# Altium PCB 64 Channel Stim (Inverted Microscope).PcbDoc
Units mm, origin at the board's own origin, x right, y up, seen from the top; angles counter-clockwise.
Board outline 85.5 x 85.5 mm, 2 copper layers (Top Layer, Bottom Layer); 21 components, 77 nets, 222 pads, 115 vias.
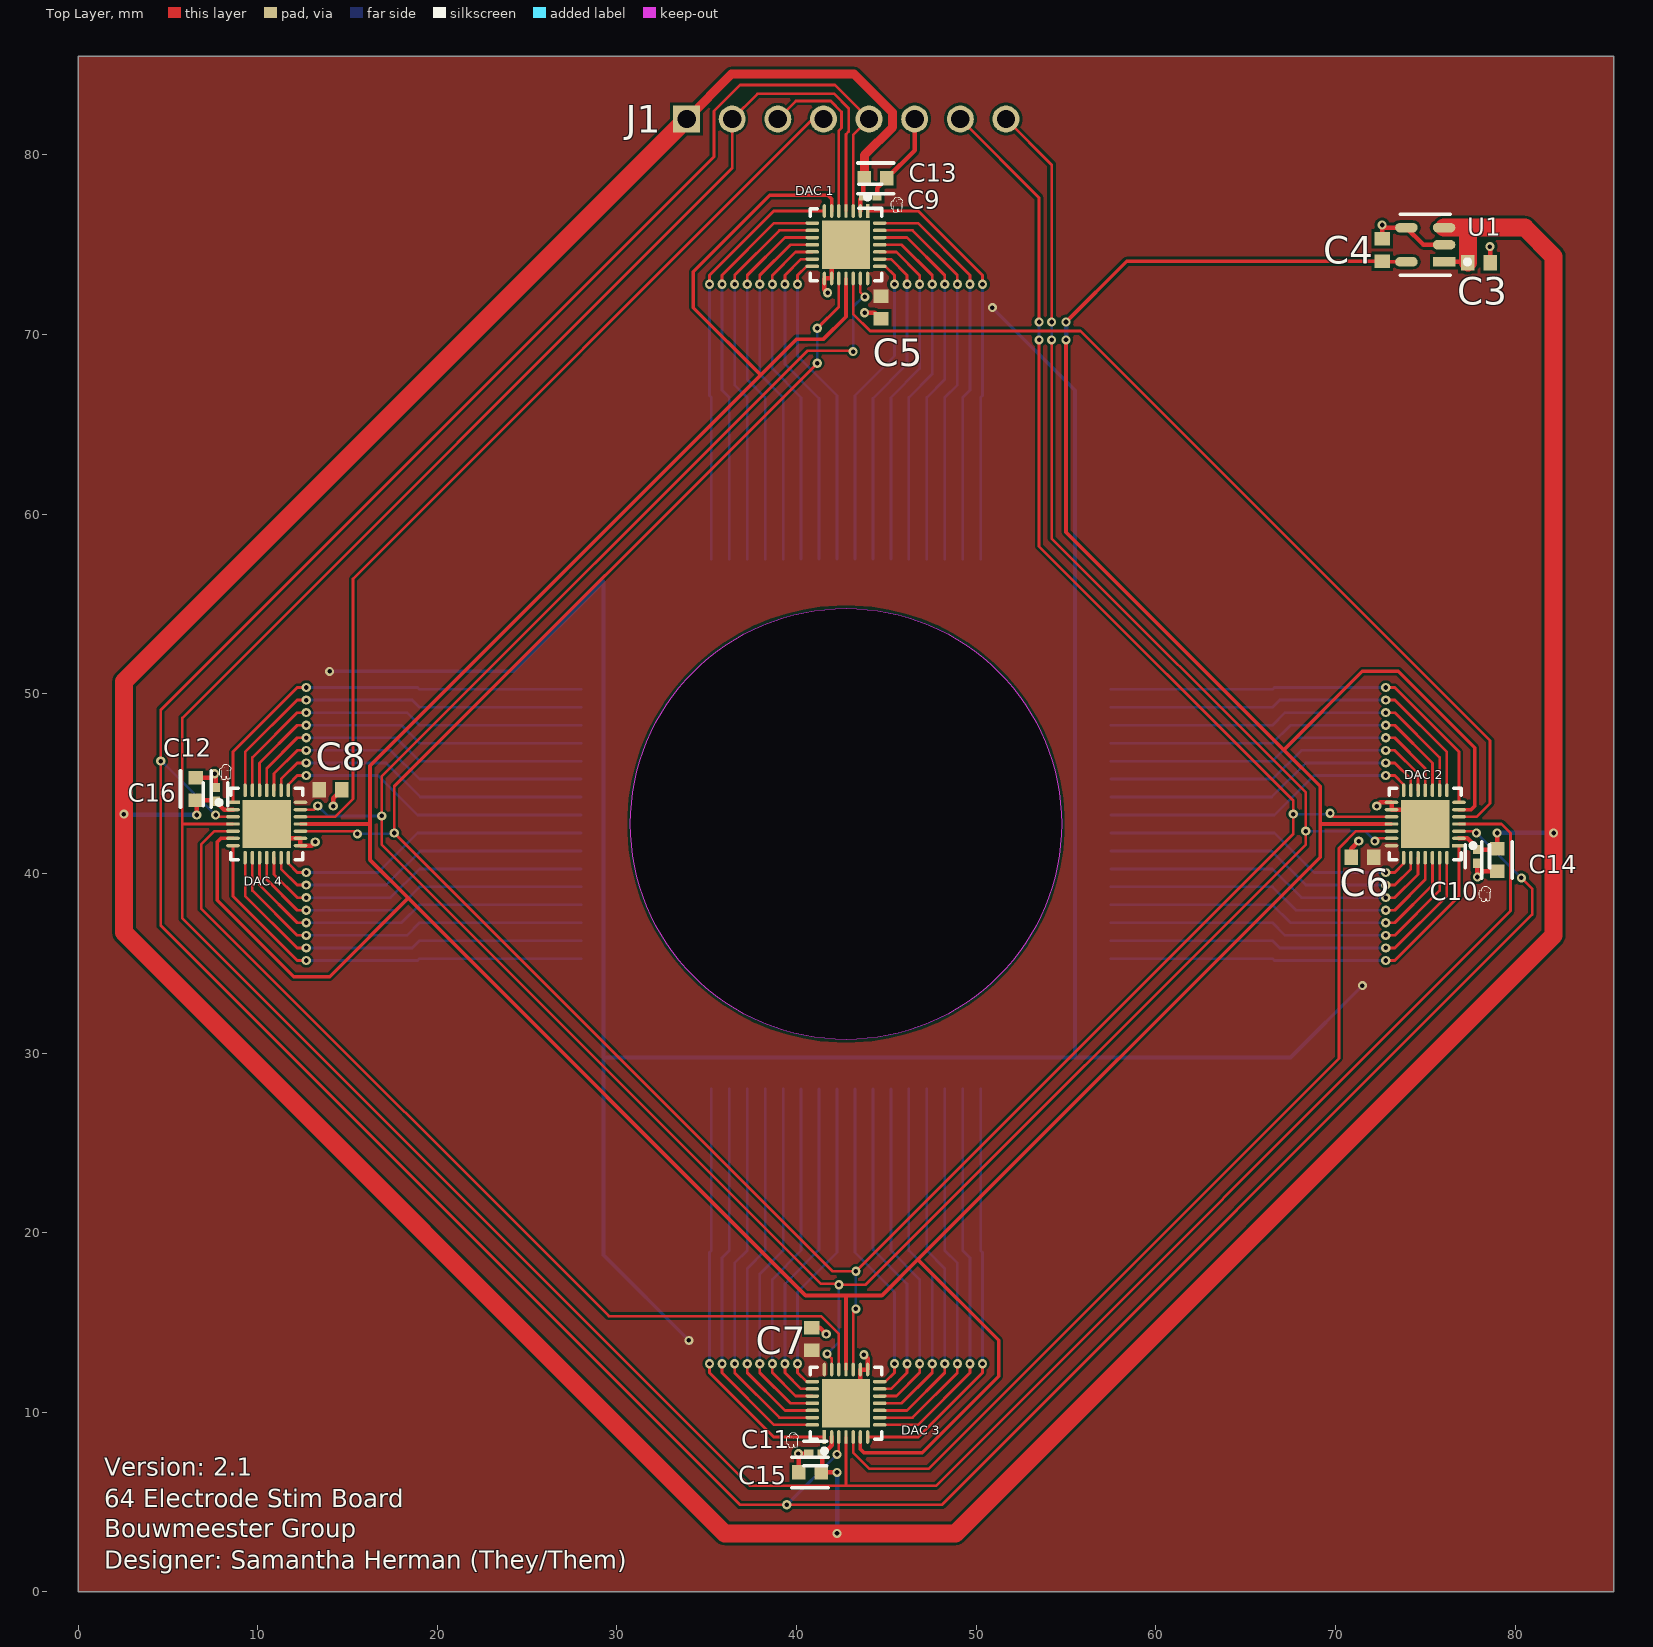
[diagram p0: Top Layer view]
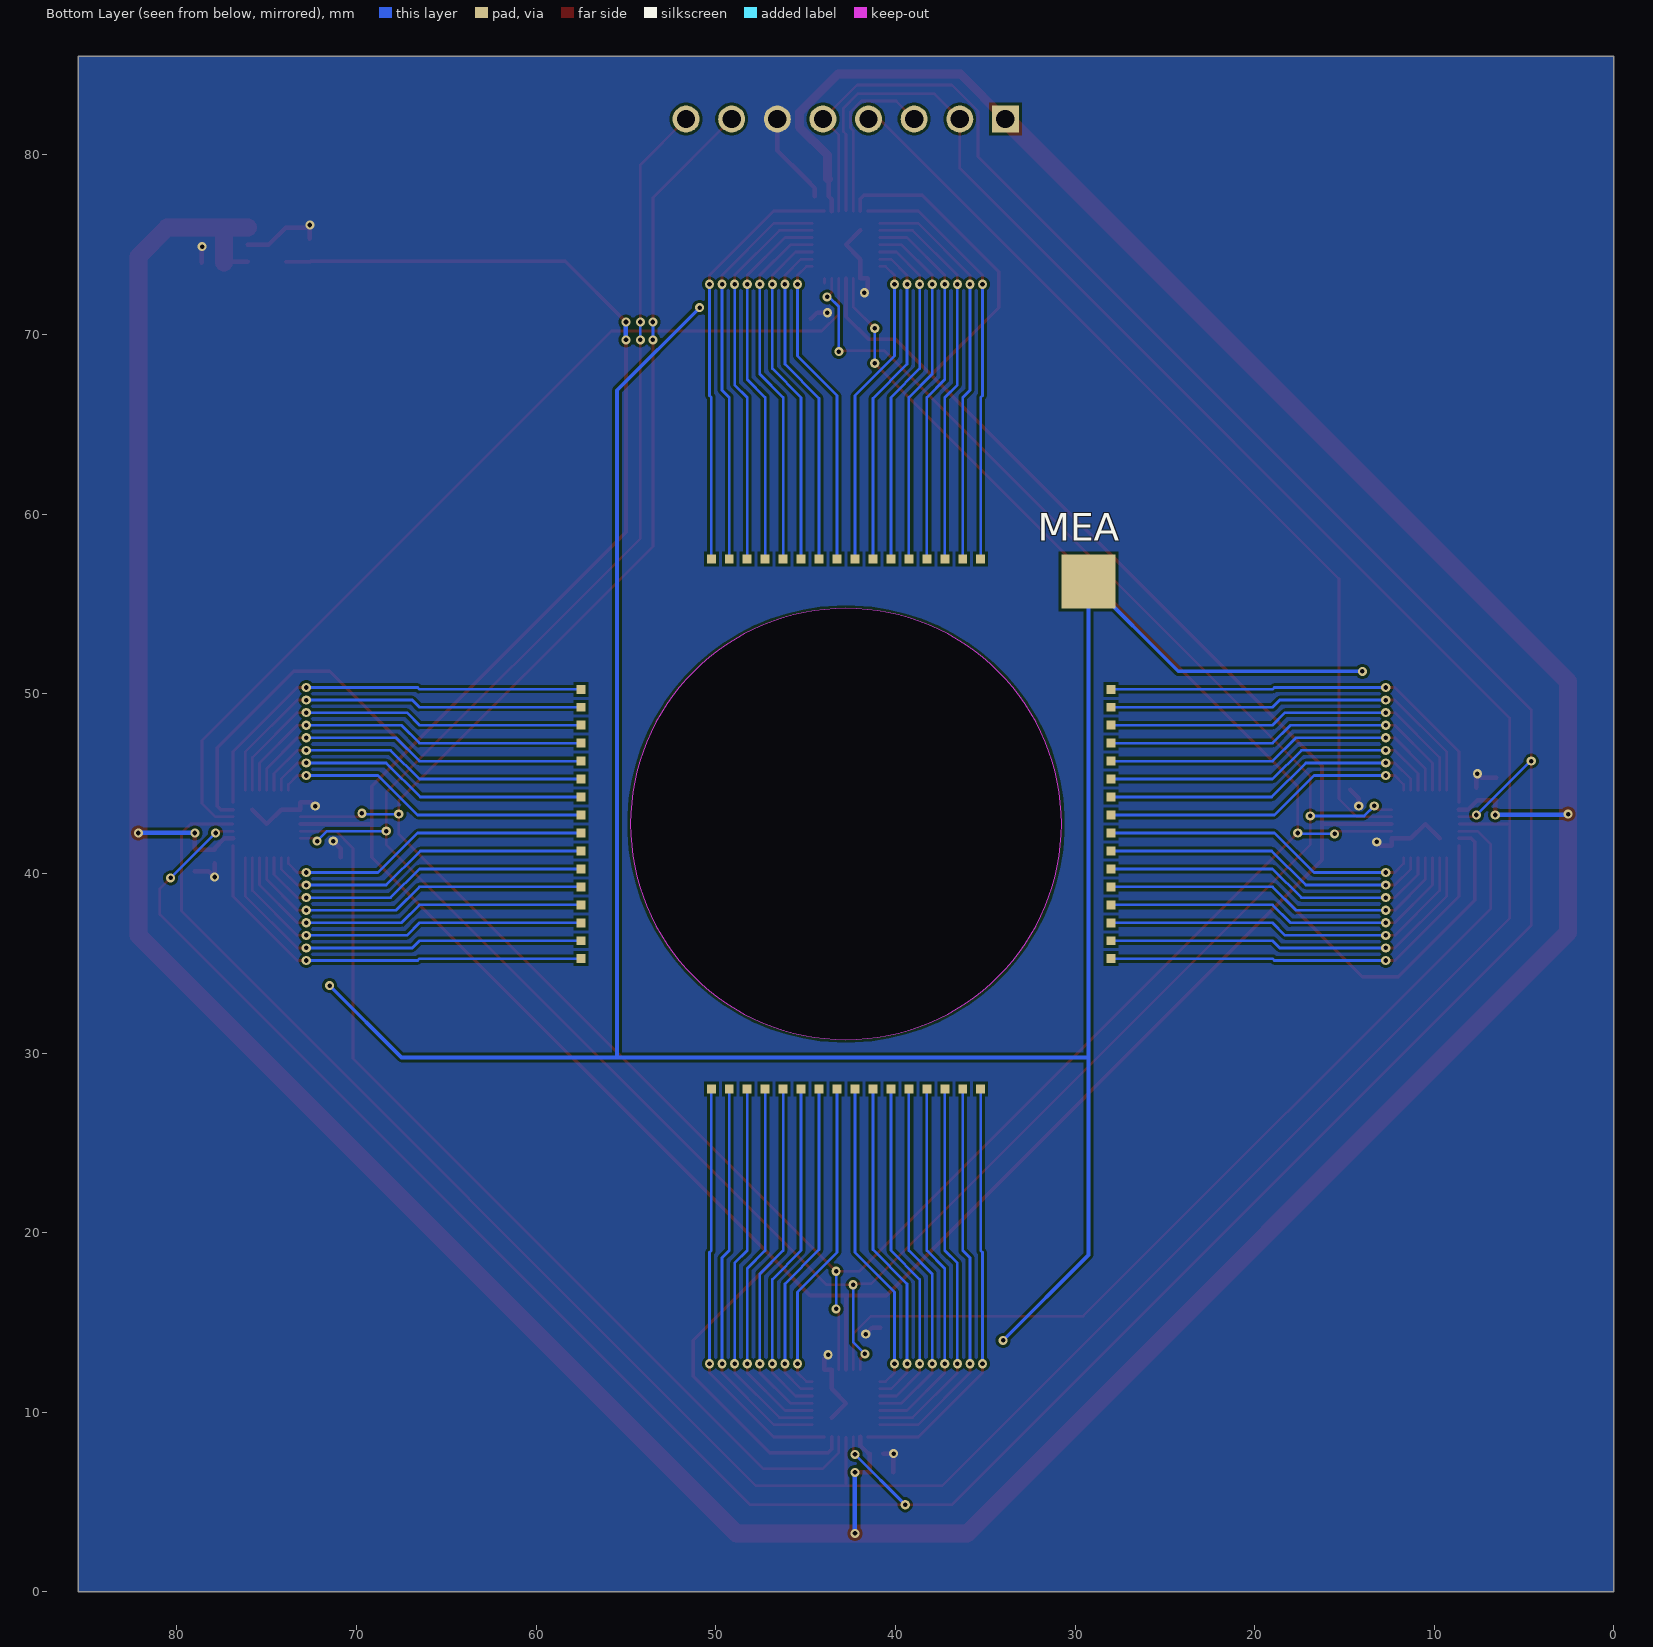
[diagram p1: Bottom Layer view, seen from below]
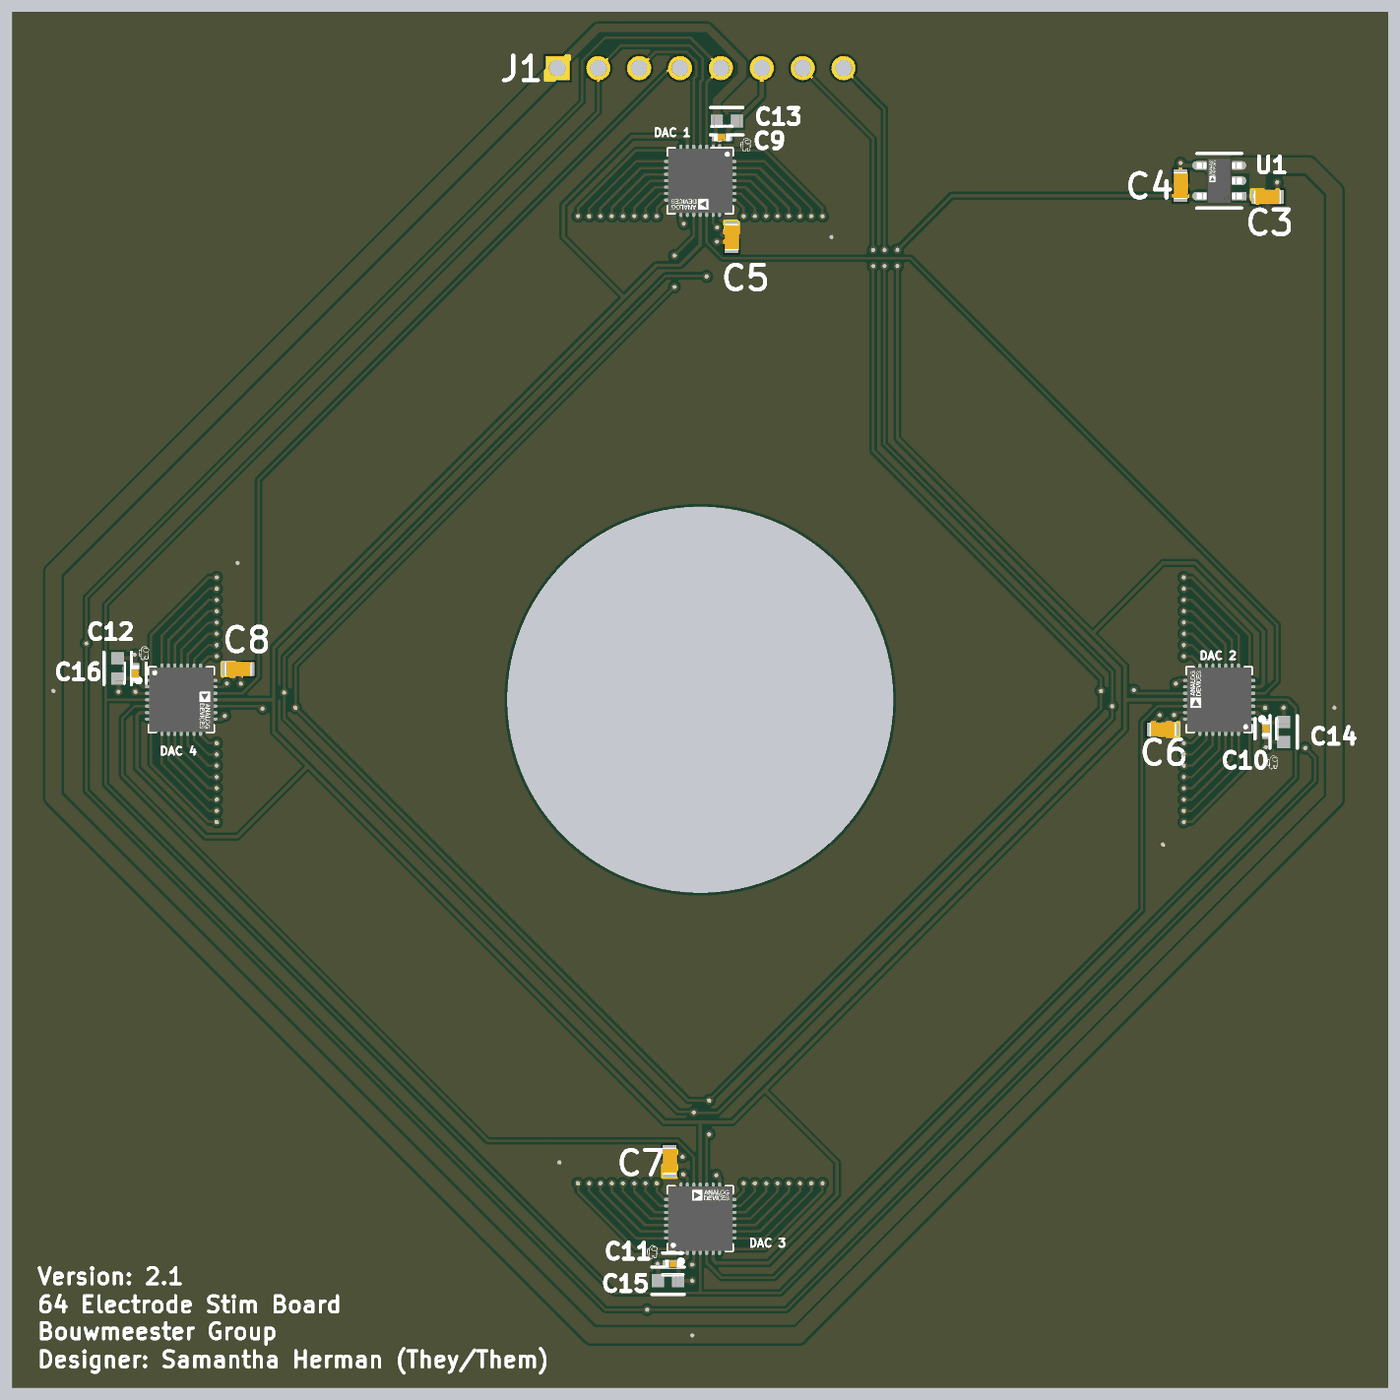
[diagram p2: 3D render of the assembled board from above, using the file's embedded part models]

## Layer stack, top to bottom
Top Solder: solder mask 0.0102, Solder Resist, Dk 3.5
Top Layer: signal copper 0.0356
Dielectric 1: dielectric 0.32, FR-4, Dk 4.8
Bottom Layer: signal copper 0.0356
Bottom Solder: solder mask 0.0102, Solder Resist, Dk 3.5

## Board outline
0,0 0,85.5 85.5,85.5 85.5,0
cut-out: 42.75,30.75 cw(c42.75,42.75) 30.75,42.75 cw(c42.75,42.75) 42.75,54.75 cw(c42.75,42.75) 54.75,42.75 cw(c42.75,42.75)

## Design rules (kind name [scope] priority, off if disabled: settings)
Clearance [All] p1: gap=0.152 ignorepadtopadclearanceinfootprint=TRUE except(0: Arc-Hole Track-Hole SMDPad-Hole THPad-Hole Via-Hole Fill-Hole Poly-Hole Region-Hole Text-Hole)
PlaneConnect [All] p1: planeconnectstyle=Direct reliefexpansion=0.508 reliefentries=4 reliefconductorwidth=0.254 reliefairgap=0.254
PolygonConnect [All] p1: connectstyle=Direct reliefconductorwidth=0.254 reliefentries=4 polygonreliefangle="90 Angle" airgapwidth=0.254
RoutingVias [All] p1: holewidth=0.254 width=0.508 viastyle="Through Hole" minholewidth=0.254 minwidth=0.508 maxholewidth=0.254 maxwidth=0.508
SolderMaskExpansion [All] p1: expansion=0.102 istentingtop=FALSE
Width [All] p1: maxlimit=1 minlimit=0.152 preferedwidth=0.2 minimp=50.000000 maximp=50.000000 favimp=50.000000
29 further rules are at their usual default settings.

## Components (designator, comment, footprint, x,y, rotation, side; value= is the part's Value field where it differs from the comment)
C3 "2.2 µF" CAPC1608X90X30LL10T20 78,74 r180 top
C4 "2.2 µF" CAPC1608X90X30LL10T20 72.6,74.7 r270 top
C5 "2.2 µF" CAPC1608X90X30LL10T20 44.7,71.5 r270 top
C6 "2.2 µF" CAPC1608X90X30LL10T20 71.5,40.9 r0 top
C7 "2.2 µF" CAPC1608X90X30LL10T20 40.85,14.075 r270 top
C8 "2.2 µF" CAPC1608X90X30LL10T20 14.05,44.65 r180 top locked
C9 "0.1 µF" FP-CL278-IPC_C 44.1,77.7 r0 top locked
C10 "0.1 µF" FP-CL278-IPC_C 77.9,40.95 r270 top
C11 "0.1 µF" FP-CL278-IPC_C 41.05,7.7 r180 top locked
C12 "0.1 µF" FP-CL278-IPC_C 7.65,44.4 r90 top locked
C13 "10 µF" FP-CL10-IPC_C 44.4,78.7 r0 top locked
C14 "10 µF" FP-CL10-IPC_C 79,40.75 r270 top
C15 "10 µF" FP-CL10-IPC_C 40.75,6.65 r180 top locked
C16 "10 µF" FP-CL10-IPC_C 6.55,44.7 r90 top locked
"DAC 1" "AD5674RBCPZ-1" FP-CP-28-9-IPC_C 42.75,75 r270 top locked
"DAC 2" "AD5674RBCPZ-1" FP-CP-28-9-IPC_C 75,42.75 r180 top locked
"DAC 3" "AD5674RBCPZ-1" FP-CP-28-9-IPC_C 42.75,10.5 r90 top locked
"DAC 4" "AD5674RBCPZ-1" FP-CP-28-9-IPC_C 10.5,42.75 r0 top locked
J1 "SPI Bus Connector" "SPI Bus Connector" 33.875,82 r90 top locked
MEA "64 Electrode Wafer (Inverted Microscope)" "64 Electrode Footprint (Inverted Microscope)" 27.75,27.75 r0 bottom
U1 "ADP160AUJZ-1.8-R7" FP-UJ-5-IPC_C 75,75 r180 top locked

## Footprints (in the part's own frame and the unit in brackets; to place one, negate y for a bottom-side part, rotate by r counter-clockwise, add the part's x,y. Pads: shape width x height; smd on the part's side, far side on the other; paste and mask are expansions set on the pad)
"64 Electrode Footprint (Inverted Microscope)" [mm]
  rect 0.5x0.5 smd mask+0: 1(7.5,-29.75) 2(8.5,-29.75) 3(9.5,-29.75) 4(10.5,-29.75) 5(11.5,-29.75) 6(12.5,-29.75) 7(13.5,-29.75) 8(14.5,-29.75) 9(15.5,-29.75) 10(16.5,-29.75) 11(17.5,-29.75) 12(18.5,-29.75) 13(19.5,-29.75) 14(20.5,-29.75) 15(21.5,-29.75) 16(22.5,-29.75) 17(29.75,-22.5) 18(29.75,-21.5) 19(29.75,-20.5) 20(29.75,-19.5) 21(29.75,-18.5) 22(29.75,-17.5) 23(29.75,-16.5) 24(29.75,-15.5) 25(29.75,-14.5) 26(29.75,-13.5) 27(29.75,-12.5) 28(29.75,-11.5) 29(29.75,-10.5) 30(29.75,-9.5) 31(29.75,-8.5) 32(29.75,-7.5) 33(22.5,-0.25) 34(21.5,-0.25) 35(20.5,-0.25) 36(19.5,-0.25) 37(18.5,-0.25) 38(17.5,-0.25) 39(16.5,-0.25) 40(15.5,-0.25) 41(14.5,-0.25) 42(13.5,-0.25) 43(12.5,-0.25) 44(11.5,-0.25) 45(10.5,-0.25) 46(9.5,-0.25) 47(8.5,-0.25) 48(7.5,-0.25) 49(0.25,-7.5) 50(0.25,-8.5) 51(0.25,-9.5) 52(0.25,-10.5) 53(0.25,-11.5) 54(0.25,-12.5) 55(0.25,-13.5) 56(0.25,-14.5) 57(0.25,-15.5) 58(0.25,-16.5) 59(0.25,-17.5) 60(0.25,-18.5) 61(0.25,-19.5) 62(0.25,-20.5) 63(0.25,-21.5) 64(0.25,-22.5)
  rect 3x3 smd mask+0: 65(1.5,-28.5)
CAPC1608X90X30LL10T20 [mm] "Chip Capacitor, 2-Leads, Body 1.70x0.90mm, IPC High Density"
  rect 0.75x0.85 smd: 1(-0.625,0) 2(0.625,0)
  body extent -0.85,-0.45 0.85,0.45, height 0.9
FP-CL10-IPC_C [mm]
  rect 0.758x0.812 smd paste+0 mask+0: 1(-0.627,0) 2(0.627,0)
  silkscreen extent -1.01,-0.85 1.01,0.85, body extent -1.11,-0.55 1.11,0.55, height 0.25
FP-CL278-IPC_C [mm]
  rect 0.515x0.472 smd paste+0 mask+0: 1(-0.379,0) 2(0.379,0)
  silkscreen extent -0.64,-0.67 0.64,0.67, body extent -0.74,-0.38 0.74,0.38, height 0.25
FP-CP-28-9-IPC_C [mm]
  rect 0.756x0.192 smd paste+0 mask+0: 1(-1.878,1.2)
  rrect100% 0.756x0.192 smd paste+0 mask+0: 2(-1.878,0.8) 3(-1.878,0.4) 4(-1.878,0) 5(-1.878,-0.4) 6(-1.878,-0.8) 7(-1.878,-1.2) 15(1.878,-1.2) 16(1.878,-0.8) 17(1.878,-0.4) 18(1.878,0) 19(1.878,0.4) 20(1.878,0.8) 21(1.878,1.2)
  rrect100% 0.192x0.756 smd paste+0 mask+0: 8(-1.2,-1.878) 9(-0.8,-1.878) 10(-0.4,-1.878) 11(0,-1.878) 12(0.4,-1.878) 13(0.8,-1.878) 14(1.2,-1.878) 22(1.2,1.878) 23(0.8,1.878) 24(0.4,1.878) 25(0,1.878) 26(-0.4,1.878) 27(-0.8,1.878) 28(-1.2,1.878)
  rect 2.7x2.7 smd paste-1000 mask+0: 29(0,0)
  silkscreen extent -2.78,-2 2,2, body extent -2.36,-2.36 2.36,2.36, height 0.25
FP-UJ-5-IPC_C [mm]
  rect 1.254x0.532 smd paste+0 mask+0: 1(-1.05,0.95)
  rrect100% 1.254x0.532 smd paste+0 mask+0: 2(-1.05,0) 3(-1.05,-0.95) 4(1.05,-0.95) 5(1.05,0.95)
  silkscreen extent -2.48,-1.7 1.4,1.7, body extent -1.78,-1.55 1.78,1.55, height 0.25
"SPI Bus Connector" [mm]
  rect 1.5x1.5 hole 1.02: 1(0,0)
  round 1.5 hole 1.02: 2(0,-2.54) 3(0,-5.08) 4(0,-7.62) 5(0,-10.16) 6(0,-12.7) 7(0,-15.24) 8(0,-17.78)

## Part data
C3 C4 C5 C6 C7 C8: library part CMP-2000-06090-1, "Chip Capacitor, 2.2 uF, +/- 10%, 10 V, -55 to 85 degC, 0603 (1608 Metric), RoHS, Tape and Reel", Capacitance=4700000pF, Case Size/Dimension=0603, Dielectric=X5R, Manufacturer="Samsung Electro-Mechanics", Package Description="2-Pin Surface Mount Device, Body 1.60 x 0.80 mm", Rated Voltage=6.3V, Tolerance (%)=±10%, Datasheet URL=http://www.samsungsem.com/kr/support/product-search/mlcc/__icsFiles/afieldfile/2016/08/18/S_CL10A475KQ8NNNC.pdf, Datasheet Version=07/2016, Manufacturer URL=http://www.samsungsem.com/global/index.jsp, Mounting Technology=SurfaceMount, Package Reference=0603
C9 C10 C11 C12: library part CMP-13271-000728-1, "Cap Ceramic 100nF 25V X5R ±10% SMD 0402 +85°C Paper T/R", Capacitance=100nF, Case Code (Imperial)=0402, Case Code (Metric)=1005, Dielectric=X5R, Max Operating Temperature=85°C, Min Operating Temperature=-55°C, Package Quantity=1, Tolerance=10%, Voltage=25V, Case/Package=0402, Depth=0.5mm, Height=0.5mm, Lead Free="Lead Free", Length=1mm, Mount="Surface Mount", Packaging="Tape and Reel", Radiation Hardening=No, Thickness=0.022inch, Voltage Rating=25V, Voltage Rating (DC)=25V, Width=0.02inch
C13 C14 C15 C16: library part CMP-13271-001938-1, "Cap Ceramic 10uF 6.3V X5R ±20% Pad SMD 0603 +85°C T/R", Capacitance=10uF, Case Code (Imperial)=0603, Case Code (Metric)=1608, Dielectric=X5R, Max Operating Temperature=85°C, Min Operating Temperature=-55°C, Package Quantity=1, Tolerance=20%, Voltage=6.3V, Case/Package=0603, Contact Plating=Tin, Depth=0.8mm, Height=0.8mm, Length=1.6mm, Mount="Surface Mount", Packaging="Tape and Reel", Radiation Hardening=No, Thickness=0.035inch, Voltage Rating=6.3V, Width=0.031inch
"DAC 1" "DAC 2" "DAC 3" "DAC 4": library part CMP-09082-000013-1, "16-CH12-BITNANODAC+WITH2PPM/CREF", RoHS Compliant=Yes
J1: "8 pin connector for SPI interface + power to board", Part Number="SPI Bus Connector"
MEA: "64 channel transparent MEA for inverted microscope", Part Number="64 Electrode Wafer (Inverted Microscope)"
U1: library part CMP-09138-000088-1, "IC REG LINEAR 1.8V 150MA TSOT5", Case/Package=TSOT, Dropout Voltage=120mV, Max Input Voltage=5.5V, Max Operating Temperature=125°C, Max Output Current=150mA, Max Output Voltage=4.2V, Max Supply Current=42uA, Min Current Limit=220mA, Min Input Voltage=2.2V, Min Operating Temperature=-40°C, Min Output Voltage=1.2V, Nominal Output Voltage=1.8V, Output Voltage Accuracy=2%, Power Supply Rejection Ratio (PSRR)=60dB, Quiescent Current=0mA, Accuracy=2%, Contact Plating=Tin, Height=0.9mm, Lead Free="Contains Lead", Length=2.9mm, Mount="Surface Mount", Nominal Supply Current=42uA, Number of Outputs=1, Number of Pins=5, Number of Regulators=1, Operating Supply Current=42uA, Output Current=150mA, Output Type=Fixed, Output Voltage=1.8V, Packaging="Tape and Reel", Polarity=Positive, Radiation Hardening=No, RoHS Compliant=Yes, Series=-, Width=1.6mm

## Via types
v1: diameter 0.508, hole 0.254, Top Layer to Bottom Layer, tented both sides, 115 vias

## Nets (pads, with @x,y where several pads share a name; then routed paths per layer and width w, separated by ;. In a path a pad name is that pad's centre, name@x,y a point inside that pad or via, vN(x,y) a via of type N, cw(c..) or ccw(c..) an arc to the next point about the centre after c; other vN are vias at no path point)
GND: "DAC 1.15" "DAC 1.16" "DAC 1.29" "DAC 2.15" "DAC 2.16" "DAC 2.29" "DAC 3.15" "DAC 3.16" "DAC 3.29" "DAC 4.15" "DAC 4.16" "DAC 4.29" C3.1 C4.1 C5.2 C6.1 C7.1 C8.1 C9.2 C10.2 C11.2 C12.2 C13.2 C14.2 C15.2 C16.2 J1.6 U1.2 U1.4 | length 39
  Top Layer w0.25: C16.2 7.377,45.327 v1(7.6,45.55) 7.65,45.5 C12.2 ; 9.7,41.95 10.5,42.75 11.3,41.95 12.378,41.95 12.378,41.55 13,41.55 v1(13.2,41.75) ; v1(14.2,43.75) 14.2,44.175 C8.1 ; C15.2 40.123,7.677 v1(40.1,7.7) C11.2 ; C7.1 41.3,14.7 v1(41.65,14.35) ; v1(41.725,72.325) 41.55,72.5 41.55,73.122 41.95,73.122 41.95,74.2 42.75,75 41.95,75.8 ; 43.55,9.7 42.75,10.5 43.55,11.3 43.55,12.378 43.95,12.378 43.95,13 v1(43.75,13.2) ; v1(43.787,71.212) 44.362,71.212 C5.2 ; C9.2 44.479,78.152 C13.2 46.575,80.248 J1.6 ; C6.1 70.875,41.375 v1(71.3,41.8) ; v1(72.3,43.75) 72.5,43.95 73.122,43.95 73.122,43.55 74.2,43.55 75,42.75 75.8,43.55 ; C4.1 v1(72.6,76.1) 72.75,75.95 U1.4 74.9,75 U1.2 ; C10.2 v1(77.9,39.8) 78.223,40.123 C14.2 ; v1(78.6,74.9) 78.625,74.875 C3.1
NetC3_2: "DAC 1.2" "DAC 2.2" "DAC 3.2" "DAC 4.2" C3.2 C9.1 C10.1 C11.1 C12.1 C13.1 C14.1 C15.1 C16.1 J1.1 U1.1 U1.3 | length 252.6
  Top Layer w0.25: v1(6.6,43.25) 6.6,44.023 C16.1 7.598,44.073 C12.1 8.121,43.55 8.622,43.55 ; 41.95,8.622 41.95,8.15 41.5,7.7 C11.1 41.429,6.702 C15.1 v1(42.25,6.65) ; 43.55,76.878 43.55,77.529 C9.1 C13.1@43.721,78.648 ; U1.1 77.325,74.05 C3.2 ; 76.878,41.95 77.35,41.95 77.9,41.4 C10.1 78.952,41.329 C14.1 v1(79,42.25)
  Top Layer w0.5: J1.1 36.375,84.5 43.2,84.5 45.35,82.35 45.35,81.55 43.773,79.973 C13.1 C13.1@43.721,78.648
  Top Layer w1: J1.1 2.55,50.675 2.55,36.7 36,3.25 v1(42.25,3.25) 48.85,3.25 82.15,36.55 v1(82.15,42.25) 82.15,74.35 80.55,75.95 U1.3 ; C3.2 77.375,75.364
  Bottom Layer w0.25: v1(2.55,43.3) 2.575,43.275 6.575,43.275 v1(6.6,43.25) ; v1(42.25,3.25) v1(42.25,6.65) ; v1(79,42.25) v1(82.15,42.25)
NetC4_2: "DAC 1.6" "DAC 1.18" "DAC 2.6" "DAC 2.18" "DAC 3.6" "DAC 3.18" "DAC 4.6" "DAC 4.18" C4.2 U1.5 | length 258.2
  Top Layer w0.2: 8.622,41.95 7.95,41.95 7.75,41.75 7.75,38.5 12,34.25 14,34.25 18.375,38.625 ; 12.378,42.75 16.25,42.75 ; 41.95,76.878 41.95,77.55 41.75,77.75 38.5,77.75 34.25,73.5 34.25,71.5 38,67.75 ; 42.75,12.378 42.75,16.5 ; 42.75,73.122 42.75,71 41.5,69.75 40,69.75 38,67.75 ; 43.55,8.622 43.55,7.95 43.75,7.75 47,7.75 51.25,12 51.25,14 46.75,18.5 ; v1(55,69.7) 55,59 67.1,46.9 ; v1(55,70.7) 58.375,74.075 72.55,74.075 72.575,74.05 U1.5 ; 73.122,42.75 69.25,42.75 69.15,42.65 ; 76.878,43.55 77.55,43.55 77.75,43.75 77.75,47 73.5,51.25 71.5,51.25 67.15,46.9 67.1,46.9 ; 16.25,42.75 16.25,40.75 18.375,38.625 ; 16.25,42.75 16.25,46 38,67.75 ; 18.375,38.625 40.5,16.5 42.75,16.5 ; 42.75,16.5 44.75,16.5 46.75,18.5 ; 46.75,18.5 69.15,40.9 69.15,42.65 ; 67.1,46.9 69.15,44.85 69.15,42.65
  Bottom Layer w0.25: v1(55,69.7) v1(55,70.7)
NetC5_1: "DAC 1.21" "DAC 2.21" "DAC 3.21" "DAC 4.21" C5.1 C6.2 C7.2 C8.2 MEA.65 | length 149.3
  Top Layer w0.152: 43.95,72.875 43.95,73.122
  Bottom Layer w0.2: v1(14,51.25) 24.25,51.25 MEA.65 29.25,29.75 ; v1(34,14) 29.25,18.75 29.25,29.75 ; v1(50.9,71.5) 55.5,66.9 55.5,29.75 ; v1(71.5,33.75) 67.5,29.75 55.5,29.75 ; 29.25,29.75 55.5,29.75
"NetDAC 1_1": "DAC 1.1" MEA.16 | length 23.7
  Top Layer w0.152: 43.95,76.878 46.772,76.878 50.35,73.3 v1(50.35,72.8)
  Bottom Layer w0.152: MEA.16 50.25,57.826 50.25,66.5 50.35,66.6 v1(50.35,72.8)
"NetDAC 1_3": "DAC 1.3" "DAC 2.3" "DAC 3.3" "DAC 4.3" J1.5 | length 194.1
  Top Layer w0.152: v1(7.65,43.25) 7.75,43.15 8.622,43.15 ; v1(42.25,7.65) 42.35,7.75 42.35,8.622 ; 43.15,76.878 43.15,81.115 J1.5 42.135,83.9 36.85,83.9 35.4,82.45 35.4,79.9 4.6,49.1 v1(4.6,46.25) 4.6,37.1 36.85,4.85 v1(39.45,4.85) 48.1,4.85 80.95,37.7 80.95,39.15 v1(80.35,39.75) ; 76.878,42.35 77.75,42.35 v1(77.85,42.25)
  Bottom Layer w0.152: v1(4.6,46.25) 4.65,46.25 v1(7.65,43.25) ; v1(39.45,4.85) v1(42.25,7.65) ; v1(77.85,42.25) v1(80.35,39.75)
"NetDAC 1_4": "DAC 1.4" "DAC 2.4" "DAC 3.4" "DAC 4.4" J1.2 | length 183.6
  Top Layer w0.152: 8.622,42.75 5.8,42.75 ; 42.75,8.622 42.75,5.9 ; 42.75,76.878 42.75,81.15 42.9,81.3 42.9,82.6 42.1,83.4 37.815,83.4 J1.2 36.415,79.265 5.8,48.65 5.8,42.75 ; 76.878,42.75 79.25,42.75 79.75,42.25 79.75,37.9 47.75,5.9 42.75,5.9 ; 5.8,42.75 5.8,37.5 37.4,5.9 42.75,5.9
"NetDAC 1_5": "DAC 1.5" J1.3 | length 9.8
  Top Layer w0.152: J1.3 39.955,83 41.9,83 42.5,82.4 42.5,81.5 42.35,81.35 42.35,76.878
"NetDAC 1_7": "DAC 1.7" MEA.1 | length 23.7
  Top Layer w0.152: v1(35.15,72.8) 35.15,73.3 38.728,76.878 41.55,76.878
  Bottom Layer w0.152: v1(35.15,72.8) 35.15,66.6 35.25,66.5 MEA.1
"NetDAC 1_8": "DAC 1.8" MEA.2 | length 22.2
  Top Layer w0.152: v1(35.85,72.8) 35.85,73.3 38.75,76.2 40.872,76.2
  Bottom Layer w0.152: v1(35.85,72.8) 35.85,66.9 36.25,66.5 MEA.2
"NetDAC 1_9": "DAC 1.9" MEA.3 | length 21.4
  Top Layer w0.152: v1(36.55,72.8) 36.55,73.3 39.05,75.8 40.872,75.8
  Bottom Layer w0.152: v1(36.55,72.8) 36.55,67.2 37.25,66.5 MEA.3
"NetDAC 1_10": "DAC 1.10" MEA.4 | length 20.7
  Top Layer w0.152: v1(37.25,72.8) 37.25,73.3 39.35,75.4 40.872,75.4
  Bottom Layer w0.152: v1(37.25,72.8) 37.25,67.5 38.25,66.5 MEA.4
"NetDAC 1_11": "DAC 1.11" MEA.5 | length 20
  Top Layer w0.152: v1(37.95,72.8) 37.95,73.3 39.65,75 40.872,75
  Bottom Layer w0.152: v1(37.95,72.8) 37.95,67.8 39.25,66.5 MEA.5
"NetDAC 1_12": "DAC 1.12" MEA.6 | length 19.2
  Top Layer w0.152: v1(38.65,72.8) 38.65,73.3 39.95,74.6 40.872,74.6
  Bottom Layer w0.152: v1(38.65,72.8) 38.65,68.1 40.25,66.5 MEA.6
"NetDAC 1_13": "DAC 1.13" MEA.7 | length 18.5
  Top Layer w0.152: v1(39.35,72.8) 39.35,73.25 39.35,73.3 40.25,74.2 40.872,74.2
  Bottom Layer w0.152: v1(39.35,72.8) 39.35,68.35 41.25,66.45 MEA.7
"NetDAC 1_14": "DAC 1.14" MEA.8 | length 17.7
  Top Layer w0.152: v1(40.05,72.8) 40.05,73.3 40.55,73.8 40.872,73.8
  Bottom Layer w0.152: v1(40.05,72.8) 40.05,68.8 42.25,66.6 MEA.8
"NetDAC 1_17": "DAC 1.17" "DAC 2.17" "DAC 3.17" "DAC 4.17" J1.7 | length 175.3
  Top Layer w0.152: 12.378,42.35 15.4,42.35 v1(15.55,42.2) ; v1(41.15,68.4) 17.6,44.85 v1(17.6,42.25) 42,17.85 v1(43.3,17.85) 67.65,42.2 v1(67.65,43.3) 67.65,44.05 53.5,58.2 v1(53.5,69.7) ; v1(41.15,70.35) 42.35,71.55 42.35,73.122 ; 43.15,12.378 43.15,15.6 v1(43.3,15.75) ; J1.7 53.5,77.615 v1(53.5,70.7) ; v1(69.7,43.35) 69.9,43.15 73.122,43.15
  Bottom Layer w0.152: v1(15.55,42.2) 17.55,42.2 v1(17.6,42.25) ; v1(41.15,68.4) v1(41.15,70.35) ; v1(43.3,15.75) v1(43.3,17.85) ; v1(53.5,69.7) v1(53.5,70.7) ; v1(67.65,43.3) 69.65,43.3 v1(69.7,43.35)
"NetDAC 1_19": "DAC 1.19" "DAC 2.5" | length 52.8
  Top Layer w0.152: 43.15,73.122 43.15,71.15 44.1,70.2 55.8,70.2 78.6,47.4 78.6,43.9 77.85,43.15 76.878,43.15
"NetDAC 1_20": "DAC 1.20" "DAC 2.20" "DAC 3.20" "DAC 4.20" J1.8 | length 178.5
  Top Layer w0.152: 12.378,43.55 13.125,43.55 v1(13.338,43.762) ; v1(41.7,13.25) 41.95,13 41.95,12.378 ; v1(43.15,69.05) 43.1,69.1 40.6,69.1 16.9,45.4 v1(16.9,43.2) 16.9,41.6 41.35,17.15 42.3,17.15 v1(42.35,17.1) 43.85,17.1 68.35,41.6 v1(68.35,42.35) 68.35,44.5 54.2,58.65 v1(54.2,69.7) ; 43.55,73.122 43.55,72.35 v1(43.8,72.1) ; J1.8 54.2,79.455 v1(54.2,70.7) ; v1(72.2,41.8) 72.35,41.95 73.122,41.95
  Bottom Layer w0.152: v1(13.338,43.762) 13.9,43.2 v1(16.9,43.2) ; v1(41.7,13.25) 42.35,13.9 v1(42.35,17.1) ; v1(43.15,69.05) 43.15,71.55 43.7,72.1 v1(43.8,72.1) ; v1(54.2,69.7) v1(54.2,70.7) ; v1(68.35,42.35) 71.65,42.35 v1(72.2,41.8)
"NetDAC 1_22": "DAC 1.22" MEA.9 | length 17.7
  Top Layer w0.152: 44.628,73.8 44.95,73.8 45.45,73.3 v1(45.45,72.8)
  Bottom Layer w0.152: MEA.9 43.25,66.6 45.45,68.8 v1(45.45,72.8)
"NetDAC 1_23": "DAC 1.23" MEA.10 | length 18.5
  Top Layer w0.152: 44.628,74.2 45.25,74.2 46.15,73.3 46.15,73.25 v1(46.15,72.8)
  Bottom Layer w0.152: MEA.10 44.25,57.826 44.25,66.45 46.15,68.35 v1(46.15,72.8)
"NetDAC 1_24": "DAC 1.24" MEA.11 | length 19.2
  Top Layer w0.152: 44.628,74.6 45.55,74.6 46.85,73.3 v1(46.85,72.8)
  Bottom Layer w0.152: MEA.11 45.25,57.826 45.25,66.5 46.85,68.1 v1(46.85,72.8)
"NetDAC 1_25": "DAC 1.25" MEA.12 | length 20
  Top Layer w0.152: 44.628,75 45.85,75 47.55,73.3 v1(47.55,72.8)
  Bottom Layer w0.152: MEA.12 46.25,57.826 46.25,66.5 47.55,67.8 v1(47.55,72.8)
"NetDAC 1_26": "DAC 1.26" MEA.13 | length 20.7
  Top Layer w0.152: 44.628,75.4 46.15,75.4 48.25,73.3 v1(48.25,72.8)
  Bottom Layer w0.152: MEA.13 47.25,66.5 48.25,67.5 v1(48.25,72.8)
"NetDAC 1_27": "DAC 1.27" MEA.14 | length 21.4
  Top Layer w0.152: 44.628,75.8 46.45,75.8 48.95,73.3 v1(48.95,72.8)
  Bottom Layer w0.152: MEA.14 48.25,57.826 48.25,66.5 48.95,67.2 v1(48.95,72.8)
"NetDAC 1_28": "DAC 1.28" MEA.15 | length 22.2
  Top Layer w0.152: 44.628,76.2 46.75,76.2 49.65,73.3 v1(49.65,72.8)
  Bottom Layer w0.152: MEA.15 49.25,57.826 49.25,66.5 49.65,66.9 v1(49.65,72.8)
"NetDAC 2_1": "DAC 2.1" MEA.32 | length 23.7
  Top Layer w0.152: v1(72.8,35.15) 73.3,35.15 76.878,38.728 76.878,41.55
  Bottom Layer w0.152: MEA.32 66.5,35.25 66.6,35.15 v1(72.8,35.15)
"NetDAC 2_7": "DAC 2.7" MEA.17 | length 23.7
  Top Layer w0.152: v1(72.8,50.35) 73.3,50.35 76.878,46.772 76.878,43.95
  Bottom Layer w0.152: MEA.17 66.5,50.25 66.6,50.35 v1(72.8,50.35)
"NetDAC 2_8": "DAC 2.8" MEA.18 | length 22.2
  Top Layer w0.152: v1(72.8,49.65) 73.3,49.65 76.2,46.75 76.2,44.628
  Bottom Layer w0.152: MEA.18 66.5,49.25 66.9,49.65 v1(72.8,49.65)
"NetDAC 2_9": "DAC 2.9" MEA.19 | length 21.4
  Top Layer w0.152: v1(72.8,48.95) 73.3,48.95 75.8,46.45 75.8,44.628
  Bottom Layer w0.152: MEA.19 66.5,48.25 67.2,48.95 v1(72.8,48.95)
"NetDAC 2_10": "DAC 2.10" MEA.20 | length 20.7
  Top Layer w0.152: v1(72.8,48.25) 73.3,48.25 75.4,46.15 75.4,44.628
  Bottom Layer w0.152: MEA.20 66.5,47.25 67.5,48.25 v1(72.8,48.25)
"NetDAC 2_11": "DAC 2.11" MEA.21 | length 20
  Top Layer w0.152: v1(72.8,47.55) 73.3,47.55 75,45.85 75,44.628
  Bottom Layer w0.152: MEA.21 66.5,46.25 67.8,47.55 v1(72.8,47.55)
"NetDAC 2_12": "DAC 2.12" MEA.22 | length 19.2
  Top Layer w0.152: v1(72.8,46.85) 73.3,46.85 74.6,45.55 74.6,44.628
  Bottom Layer w0.152: MEA.22 66.5,45.25 68.1,46.85 v1(72.8,46.85)
"NetDAC 2_13": "DAC 2.13" MEA.23 | length 18.5
  Top Layer w0.152: v1(72.8,46.15) 73.25,46.15 73.3,46.15 74.2,45.25 74.2,44.628
  Bottom Layer w0.152: MEA.23 66.45,44.25 68.35,46.15 v1(72.8,46.15)
"NetDAC 2_14": "DAC 2.14" MEA.24 | length 17.7
  Top Layer w0.152: v1(72.8,45.45) 73.3,45.45 73.8,44.95 73.8,44.628
  Bottom Layer w0.152: MEA.24 66.6,43.25 68.8,45.45 v1(72.8,45.45)
"NetDAC 2_19": "DAC 2.19" "DAC 3.5" | length 52.8
  Top Layer w0.152: 43.15,8.622 43.15,7.75 44.05,6.85 47.35,6.85 70.2,29.7 70.2,41.4 71.15,42.35 73.122,42.35
"NetDAC 2_22": "DAC 2.22" MEA.25 | length 17.7
  Top Layer w0.152: v1(72.8,40.05) 73.3,40.05 73.8,40.55 73.8,40.872
  Bottom Layer w0.152: MEA.25 66.6,42.25 68.8,40.05 v1(72.8,40.05)
"NetDAC 2_23": "DAC 2.23" MEA.26 | length 18.5
  Top Layer w0.152: v1(72.8,39.35) 73.25,39.35 73.3,39.35 74.2,40.25 74.2,40.872
  Bottom Layer w0.152: MEA.26 66.45,41.25 68.35,39.35 v1(72.8,39.35)
"NetDAC 2_24": "DAC 2.24" MEA.27 | length 19.2
  Top Layer w0.152: v1(72.8,38.65) 73.3,38.65 74.6,39.95 74.6,40.872
  Bottom Layer w0.152: MEA.27 66.5,40.25 68.1,38.65 v1(72.8,38.65)
"NetDAC 2_25": "DAC 2.25" MEA.28 | length 20
  Top Layer w0.152: v1(72.8,37.95) 73.3,37.95 75,39.65 75,40.872
  Bottom Layer w0.152: MEA.28 66.5,39.25 67.8,37.95 v1(72.8,37.95)
"NetDAC 2_26": "DAC 2.26" MEA.29 | length 20.7
  Top Layer w0.152: v1(72.8,37.25) 73.3,37.25 75.4,39.35 75.4,40.872
  Bottom Layer w0.152: MEA.29 66.5,38.25 67.5,37.25 v1(72.8,37.25)
"NetDAC 2_27": "DAC 2.27" MEA.30 | length 21.4
  Top Layer w0.152: v1(72.8,36.55) 73.3,36.55 75.8,39.05 75.8,40.872
  Bottom Layer w0.152: MEA.30 66.5,37.25 67.2,36.55 v1(72.8,36.55)
"NetDAC 2_28": "DAC 2.28" MEA.31 | length 22.2
  Top Layer w0.152: v1(72.8,35.85) 73.3,35.85 76.2,38.75 76.2,40.872
  Bottom Layer w0.152: MEA.31 66.5,36.25 66.9,35.85 v1(72.8,35.85)
"NetDAC 3_1": "DAC 3.1" MEA.48 | length 23.7
  Top Layer w0.152: v1(35.15,12.7) 35.15,12.2 38.728,8.622 41.55,8.622
  Bottom Layer w0.152: v1(35.15,12.7) 35.15,18.9 35.25,19 MEA.48
"NetDAC 3_7": "DAC 3.7" MEA.33 | length 23.7
  Top Layer w0.152: 43.95,8.622 46.772,8.622 50.35,12.2 v1(50.35,12.7)
  Bottom Layer w0.152: MEA.33 50.25,19 50.35,18.9 v1(50.35,12.7)
"NetDAC 3_8": "DAC 3.8" MEA.34 | length 22.2
  Top Layer w0.152: 44.628,9.3 46.75,9.3 49.65,12.2 v1(49.65,12.7)
  Bottom Layer w0.152: MEA.34 49.25,19 49.65,18.6 v1(49.65,12.7)
"NetDAC 3_9": "DAC 3.9" MEA.35 | length 21.4
  Top Layer w0.152: 44.628,9.7 46.45,9.7 48.95,12.2 v1(48.95,12.7)
  Bottom Layer w0.152: MEA.35 48.25,19 48.95,18.3 v1(48.95,12.7)
"NetDAC 3_10": "DAC 3.10" MEA.36 | length 20.7
  Top Layer w0.152: 44.628,10.1 46.15,10.1 48.25,12.2 v1(48.25,12.7)
  Bottom Layer w0.152: MEA.36 47.25,19 48.25,18 v1(48.25,12.7)
"NetDAC 3_11": "DAC 3.11" MEA.37 | length 20
  Top Layer w0.152: 44.628,10.5 45.85,10.5 47.55,12.2 v1(47.55,12.7)
  Bottom Layer w0.152: MEA.37 46.25,19 47.55,17.7 v1(47.55,12.7)
"NetDAC 3_12": "DAC 3.12" MEA.38 | length 19.2
  Top Layer w0.152: 44.628,10.9 45.55,10.9 46.85,12.2 v1(46.85,12.7)
  Bottom Layer w0.152: MEA.38 45.25,19 46.85,17.4 v1(46.85,12.7)
"NetDAC 3_13": "DAC 3.13" MEA.39 | length 18.5
  Top Layer w0.152: 44.628,11.3 45.25,11.3 46.15,12.2 46.15,12.25 v1(46.15,12.7)
  Bottom Layer w0.152: MEA.39 44.25,19.05 46.15,17.15 v1(46.15,12.7)
"NetDAC 3_14": "DAC 3.14" MEA.40 | length 17.7
  Top Layer w0.152: 44.628,11.7 44.95,11.7 45.45,12.2 v1(45.45,12.7)
  Bottom Layer w0.152: MEA.40 43.25,18.9 45.45,16.7 v1(45.45,12.7)
"NetDAC 3_19": "DAC 3.19" "DAC 4.5" | length 52.9
  Top Layer w0.152: 8.622,42.35 7.6,42.35 6.85,41.6 6.85,38.05 29.55,15.35 41.35,15.35 42.35,14.35 42.35,12.378
"NetDAC 3_22": "DAC 3.22" MEA.41 | length 17.7
  Top Layer w0.152: v1(40.05,12.7) 40.05,12.2 40.55,11.7 40.872,11.7
  Bottom Layer w0.152: v1(40.05,12.7) 40.05,16.7 42.25,18.9 MEA.41
"NetDAC 3_23": "DAC 3.23" MEA.42 | length 18.5
  Top Layer w0.152: v1(39.35,12.7) 39.35,12.25 39.35,12.2 40.25,11.3 40.872,11.3
  Bottom Layer w0.152: v1(39.35,12.7) 39.35,17.15 41.25,19.05 MEA.42
"NetDAC 3_24": "DAC 3.24" MEA.43 | length 19.2
  Top Layer w0.152: v1(38.65,12.7) 38.65,12.2 39.95,10.9 40.872,10.9
  Bottom Layer w0.152: v1(38.65,12.7) 38.65,17.4 40.25,19 MEA.43
"NetDAC 3_25": "DAC 3.25" MEA.44 | length 20
  Top Layer w0.152: v1(37.95,12.7) 37.95,12.2 39.65,10.5 40.872,10.5
  Bottom Layer w0.152: v1(37.95,12.7) 37.95,17.7 39.25,19 MEA.44
"NetDAC 3_26": "DAC 3.26" MEA.45 | length 20.7
  Top Layer w0.152: v1(37.25,12.7) 37.25,12.2 39.35,10.1 40.872,10.1
  Bottom Layer w0.152: v1(37.25,12.7) 37.25,18 38.25,19 MEA.45
"NetDAC 3_27": "DAC 3.27" MEA.46 | length 21.4
  Top Layer w0.152: v1(36.55,12.7) 36.55,12.2 39.05,9.7 40.872,9.7
  Bottom Layer w0.152: v1(36.55,12.7) 36.55,18.3 37.25,19 MEA.46
"NetDAC 3_28": "DAC 3.28" MEA.47 | length 22.2
  Top Layer w0.152: v1(35.85,12.7) 35.85,12.2 38.75,9.3 40.872,9.3
  Bottom Layer w0.152: v1(35.85,12.7) 35.85,18.6 36.25,19 MEA.47
"NetDAC 4_1": "DAC 4.1" MEA.64 | length 23.7
  Top Layer w0.152: 8.622,43.95 8.622,46.772 12.2,50.35 v1(12.7,50.35)
  Bottom Layer w0.152: v1(12.7,50.35) 18.9,50.35 19,50.25 MEA.64
"NetDAC 4_7": "DAC 4.7" MEA.49 | length 23.7
  Top Layer w0.152: 8.622,41.55 8.622,38.728 12.2,35.15 v1(12.7,35.15)
  Bottom Layer w0.152: v1(12.7,35.15) 18.9,35.15 19,35.25 MEA.49
"NetDAC 4_8": "DAC 4.8" MEA.50 | length 22.2
  Top Layer w0.152: 9.3,40.872 9.3,38.75 12.2,35.85 v1(12.7,35.85)
  Bottom Layer w0.152: v1(12.7,35.85) 18.6,35.85 19,36.25 MEA.50
"NetDAC 4_9": "DAC 4.9" MEA.51 | length 21.4
  Top Layer w0.152: 9.7,40.872 9.7,39.05 12.2,36.55 v1(12.7,36.55)
  Bottom Layer w0.152: v1(12.7,36.55) 18.3,36.55 19,37.25 MEA.51
"NetDAC 4_10": "DAC 4.10" MEA.52 | length 20.7
  Top Layer w0.152: 10.1,40.872 10.1,39.35 12.2,37.25 v1(12.7,37.25)
  Bottom Layer w0.152: v1(12.7,37.25) 18,37.25 19,38.25 MEA.52
"NetDAC 4_11": "DAC 4.11" MEA.53 | length 20
  Top Layer w0.152: 10.5,40.872 10.5,39.65 12.2,37.95 v1(12.7,37.95)
  Bottom Layer w0.152: v1(12.7,37.95) 17.7,37.95 19,39.25 MEA.53
"NetDAC 4_12": "DAC 4.12" MEA.54 | length 19.2
  Top Layer w0.152: 10.9,40.872 10.9,39.95 12.2,38.65 v1(12.7,38.65)
  Bottom Layer w0.152: v1(12.7,38.65) 17.4,38.65 19,40.25 MEA.54
"NetDAC 4_13": "DAC 4.13" MEA.55 | length 18.5
  Top Layer w0.152: 11.3,40.872 11.3,40.25 12.2,39.35 12.25,39.35 v1(12.7,39.35)
  Bottom Layer w0.152: v1(12.7,39.35) 17.15,39.35 19.05,41.25 MEA.55
"NetDAC 4_14": "DAC 4.14" MEA.56 | length 17.7
  Top Layer w0.152: 11.7,40.872 11.7,40.55 12.2,40.05 v1(12.7,40.05)
  Bottom Layer w0.152: v1(12.7,40.05) 16.7,40.05 18.9,42.25 MEA.56
"NetDAC 4_19": "DAC 4.19" J1.4 | length 52.4
  Top Layer w0.152: 12.378,43.15 14.3,43.15 15.3,44.15 15.3,56.4 40.9,82 J1.4
"NetDAC 4_22": "DAC 4.22" MEA.57 | length 17.7
  Top Layer w0.152: 11.7,44.628 11.7,44.95 12.2,45.45 v1(12.7,45.45)
  Bottom Layer w0.152: v1(12.7,45.45) 16.7,45.45 18.9,43.25 MEA.57
"NetDAC 4_23": "DAC 4.23" MEA.58 | length 18.5
  Top Layer w0.152: 11.3,44.628 11.3,45.25 12.2,46.15 12.25,46.15 v1(12.7,46.15)
  Bottom Layer w0.152: v1(12.7,46.15) 17.15,46.15 19.05,44.25 MEA.58
"NetDAC 4_24": "DAC 4.24" MEA.59 | length 19.2
  Top Layer w0.152: 10.9,44.628 10.9,45.55 12.2,46.85 v1(12.7,46.85)
  Bottom Layer w0.152: v1(12.7,46.85) 17.4,46.85 19,45.25 MEA.59
"NetDAC 4_25": "DAC 4.25" MEA.60 | length 20
  Top Layer w0.152: 10.5,44.628 10.5,45.85 12.2,47.55 v1(12.7,47.55)
  Bottom Layer w0.152: v1(12.7,47.55) 17.7,47.55 19,46.25 MEA.60
"NetDAC 4_26": "DAC 4.26" MEA.61 | length 20.7
  Top Layer w0.152: 10.1,44.628 10.1,46.15 12.2,48.25 v1(12.7,48.25)
  Bottom Layer w0.152: v1(12.7,48.25) 18,48.25 19,47.25 MEA.61
"NetDAC 4_27": "DAC 4.27" MEA.62 | length 21.4
  Top Layer w0.152: 9.7,44.628 9.7,46.45 12.2,48.95 v1(12.7,48.95)
  Bottom Layer w0.152: v1(12.7,48.95) 18.3,48.95 19,48.25 MEA.62
"NetDAC 4_28": "DAC 4.28" MEA.63 | length 22.2
  Top Layer w0.152: 9.3,44.628 9.3,46.75 12.2,49.65 v1(12.7,49.65)
  Bottom Layer w0.152: v1(12.7,49.65) 18.6,49.65 19,49.25 MEA.63

## Polygon pours and split planes (outlines as drawn)
GND on Bottom Layer "GND_L02_P000" (solid, pour order 0): 0,0 0,85.5 85.5,85.5 85.5,0
NetC5_1 on Top Layer "NETC5_1_L01_P001" (solid, pour order 1): 0,0 0,85.5 85.5,85.5 85.5,0

## Silkscreen, mask and mechanical layers (free items; w line width, h text height)
Top Overlay:
  drawing of 4 lines, arcs and shapes, not listed
  text "Version: 2.1" at 1.45,6.45 h1
  text "64 Electrode Stim Board" at 1.45,4.7 h1
  text "Bouwmeester Group" at 1.45,3.033 h1
  text "Designer: Samantha Herman (They/Them)" at 1.45,1.283 h1
Mechanical 1:
  lines w0: 0,0 85.5,0 85.5,85.5 0,85.5 0,0 ; 30.75,42.75 cw(c42.75,42.75) 42.75,54.75 cw(c42.75,42.75) 54.75,42.75 cw(c42.75,42.75) 42.75,30.75 cw(c42.75,42.75) 30.75,42.75